# EAGLE board sensor (EAGLE 6.6.0)
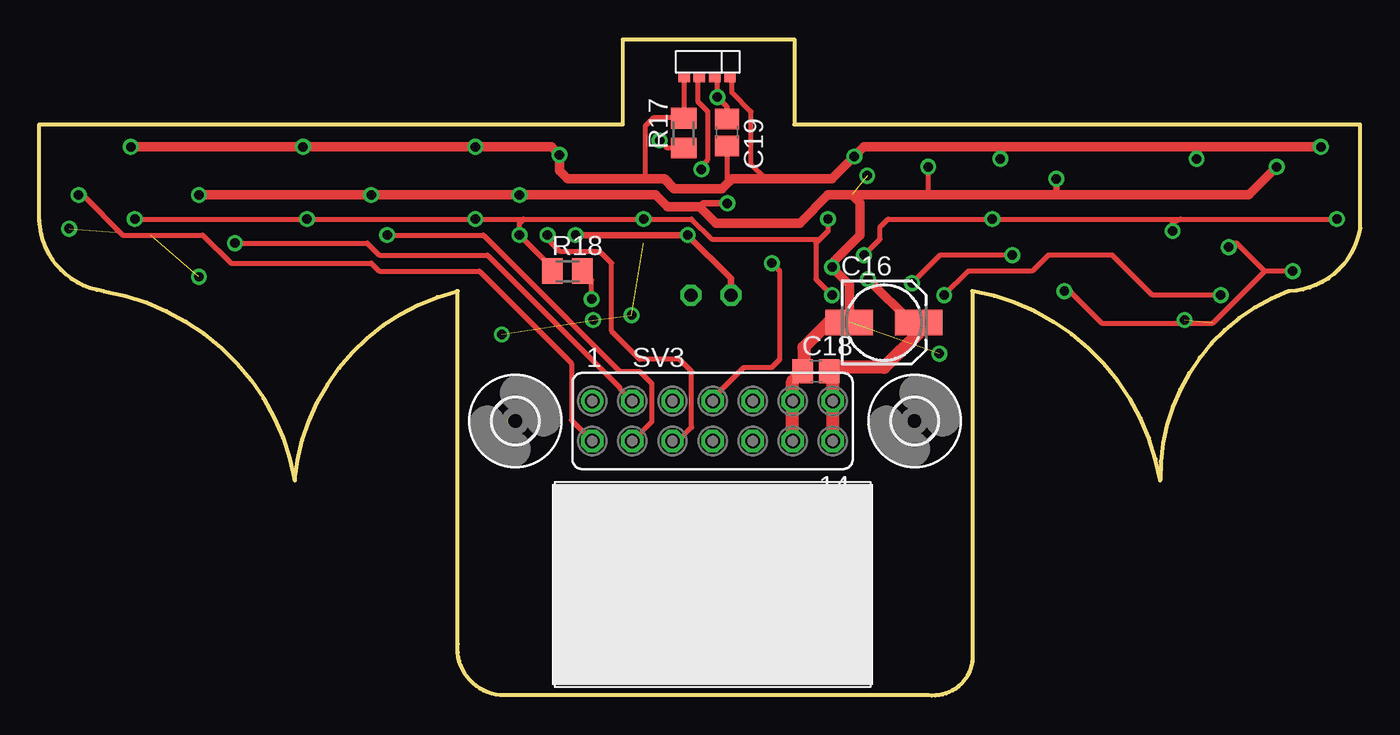
[diagram p0: board, top side]
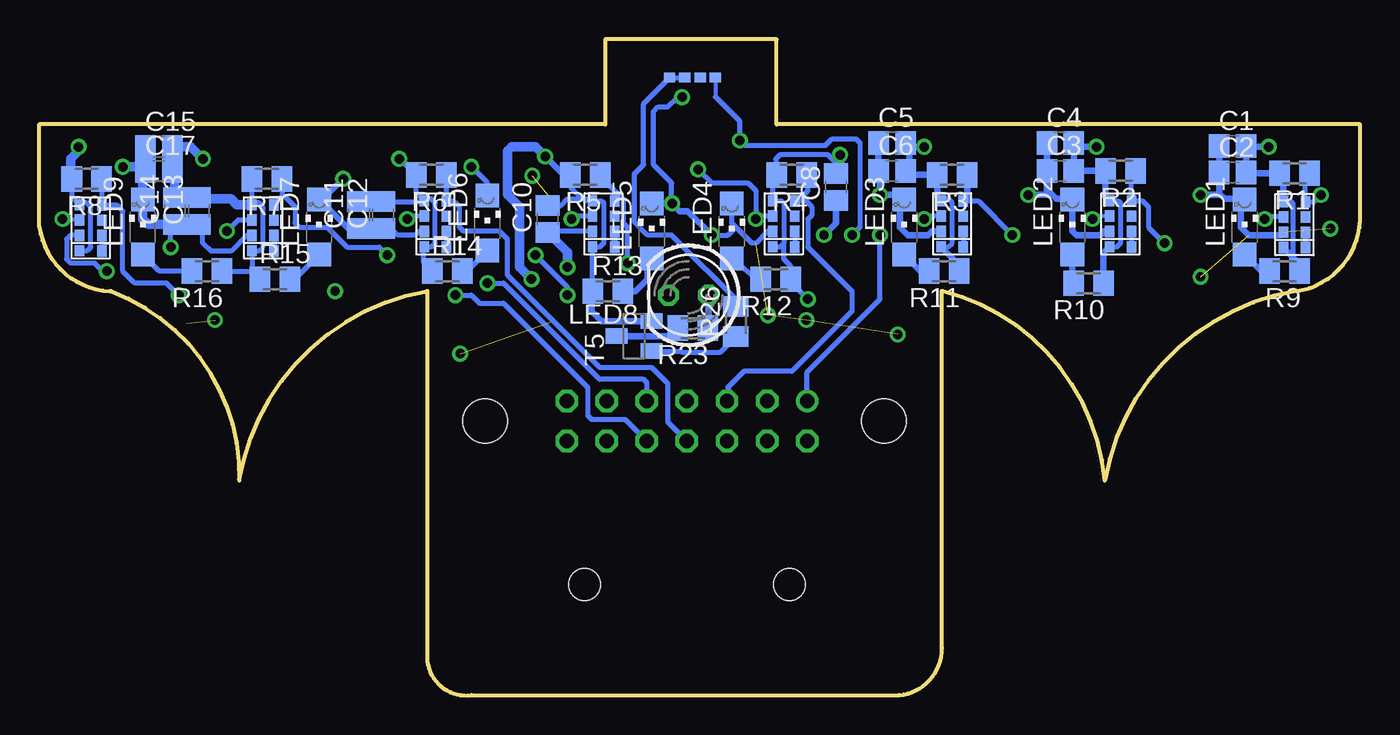
[diagram p1: board, bottom side, seen from below]

Size 83.72 x 41.57 mm. Coordinates in mm from the lower left corner, seen from the top.
Outline: 0,36.19 36.98,36.19 36.98,41.57 47.85,41.57 47.85,36.19 83.72,36.19 83.72,29.69 arc-80 79.25,25.62 79.17,25.62 arc71 71.04,13.63 arc71 59.16,25.62 59.13,25.62 59.13,2.15 arc-90 56.34,0.02 29.21,0.02 arc-90 26.52,3.27 26.52,25.62 26.47,25.62 arc71 16.18,13.63 arc71 4.06,25.62 arc-80 0,30.09 0,36.19
Copper layers (1*16): Top 0.035mm / dielectric 1.5mm / Bottom 0.035mm
Design rules "default *": minimum track width 10mil, minimum drill 24mil, track to track 10mil, track to pad 10mil, pad to pad 10mil, via to via 10mil, smd to smd 10mil, copper to edge 40mil, drill to drill 8mil, minimum pad ring 10mil, minimum via ring 8mil, stop-mask expansion 4mil, vias tented up to drill 0mil, thermal gap 10mil

## Footprints (pad centres in the part's own frame; a part is rotated, then mirrored left to right if it is on the bottom)
C0805 = smd 1.3 x 1.5: 1 -0.85,0; 2 0.85,0
153CLV-0505 = smd 3 x 1.6: + 2.2,0; - -2.2,0
2,8 = hole 2.8: 0,0
CHIPLED_1206 = smd 1.5 x 1.5: A 0,-1.75; C 0,1.75
LED5MM = drill 0.813 octagon: A -1.27,0; K 1.27,0
M0805 = smd 1.3 x 1.6: 1 -0.95,0; 2 0.95,0
FE07-2 = drill 0.914: 1 -7.62,1.27 | drill 0.914 octagon: 2 -7.62,-1.27; 3 -5.08,1.27; 4 -5.08,-1.27; 5 -2.54,1.27; 6 -2.54,-1.27; 7 0,1.27; 8 0,-1.27; 9 2.54,1.27; 10 2.54,-1.27; 11 5.08,1.27; 12 5.08,-1.27; 13 7.62,1.27; 14 7.62,-1.27
SOT23-BEC = smd 1 x 1.4: B -0.95,-1.1; C 0,1.1; E 0.95,-1.1
APDS9950 = smd 0.6 x 0.72: P$1 0.7,1.4; P$2 0.7,0.43; P$3 0.7,-0.54; P$4 0.7,-1.51; P$5 -0.7,-1.5; P$6 -0.7,-0.53; P$7 -0.7,0.44; P$8 -0.7,1.41
APDS9950_EDGE = smd 0.6 x 0.72 bottom: P$1 -0.9,1.5; P$2 -0.9,0.53; P$3 -0.9,-0.44; P$4 -0.9,-1.41 | smd 0.6 x 0.72: P$5 -0.9,-1.41; P$6 -0.9,-0.44; P$7 -0.9,0.53; P$8 -0.9,1.5
BALL_HOLE = hole 2: -6.5,0; 6.5,0

## Placement (x,y rotation side)
C1  10uF  [C0805]  8.08,34.82 0 bottom
C2  100n  [C0805]  8.08,33.14 0 bottom
C3  10uF  [C0805]  19,33.24 0 bottom
C4  100n  [C0805]  19,35.02 0 bottom
C5  10uF  [C0805]  29.67,35.02 0 bottom
C6  100n  [C0805]  29.67,33.24 0 bottom
C8  100n  [C0805]  33.22,32.23 90 bottom
C10  100n  [C0805]  51.51,30.2 90 bottom
C11  10uF  [C0805]  63.45,30.45 90 bottom
C12  100n  [C0805]  61.93,30.45 90 bottom
C13  10uF  [C0805]  73.61,30.7 90 bottom
C14  100n  [C0805]  75.13,30.7 90 bottom
C15  10uF  [C0805]  76.15,34.77 0 bottom
C16  22uF  [153CLV-0505]  53.54,23.64 0 top
C17  100n  [C0805]  76.15,33.24 0 bottom
C18  10uF  [C0805]  49.23,20.54 0 top
C19  100n  [C0805]  43.59,35.68 270 top
H3  MOUNT-HOLE2.8  [2,8]  30.18,17.39 0 top
H4  MOUNT-HOLE2.8  [2,8]  55.47,17.39 0 top
LED1  [CHIPLED_1206]  7.32,29.69 0 bottom
LED2  [CHIPLED_1206]  18.24,29.69 0 bottom
LED3  [CHIPLED_1206]  28.91,29.69 0 bottom
LED4  [CHIPLED_1206]  39.83,29.43 0 bottom
LED5  [CHIPLED_1206]  44.91,29.43 0 bottom
LED6  [CHIPLED_1206]  55.32,29.94 0 bottom
LED7  [CHIPLED_1206]  65.99,29.69 0 bottom
LED8  [LED5MM]  42.57,25.37 180 bottom
LED9  [CHIPLED_1206]  77.17,29.69 0 bottom
R1  4k7  [M0805]  4.17,33.09 180 bottom
R2  4k7  [M0805]  15.19,33.24 180 bottom
R3  4k7  [M0805]  25.86,32.99 180 bottom
R4  4k7  [M0805]  36.02,32.99 180 bottom
R5  4k7  [M0805]  49.12,32.99 180 bottom
R6  4k7  [M0805]  58.88,32.99 180 bottom
R7  4k7  [M0805]  69.29,32.74 180 bottom
R8  4k7  [M0805]  80.72,32.74 180 bottom
R9  330  [M0805]  4.78,26.89 180 bottom
R10  330  [M0805]  17.22,26.13 180 bottom
R11  330  [M0805]  26.37,26.89 180 bottom
R12  330  [M0805]  37.03,26.39 180 bottom
R13  330  [M0805]  47.7,25.62 0 bottom
R14  330  [M0805]  57.86,26.89 0 bottom
R15  330  [M0805]  68.78,26.39 0 bottom
R16  330  [M0805]  73.1,26.89 180 bottom
R17  4k7  [M0805]  40.84,35.63 90 top
R18  4k7  [M0805]  33.48,26.89 0 top
R23  22  [M0805]  42.32,23.29 180 bottom
R26  330  [M0805]  39.57,23.69 90 bottom
SV3  [FE07-2]  42.67,17.39 0 top
T5  [SOT23-BEC]  46.02,22.78 90 bottom
U$1  APDS9950  [APDS9950]  4.17,29.89 0 bottom
U$2  APDS9950_EDGE  [APDS9950_EDGE]  42.37,40.05 90 top
U$3  [BALL_HOLE]  42.67,7.03 0 top
U$4  APDS9950  [APDS9950]  15.19,29.94 0 bottom
U$5  APDS9950  [APDS9950]  25.86,29.94 0 bottom
U$6  APDS9950  [APDS9950]  36.53,29.94 0 bottom
U$7  APDS9950  [APDS9950]  47.96,29.94 0 bottom
U$8  APDS9950  [APDS9950]  58.62,29.94 0 bottom
U$9  APDS9950  [APDS9950]  69.55,29.69 0 bottom
U$10  APDS9950  [APDS9950]  80.47,29.69 0 bottom

## Library data of the parts
C1-C6 C8 C10-C19 R1-R18 R23 R26 = resistor
H3 H4 = holes
LED1-LED7 LED9 U$1 U$2 U$4-U$10 = my_parts
LED8 = led
SV3 = con-lsta; OC_FARNELL: unknown; OC_NEWARK: unknown
T5 = transistor
U$3 = pololu

## Nets
+3V3: C1.2 C2.2 C3.2 C4.2 C5.2 C6.2 C8.2 C10.2 C11.2 C12.2 C13.2 C14.2 C15.2 C16.+ C17.2 C18.2 C19.2 R1.2 R2.2 R3.2 R4.2 R5.2 R6.2 R7.2 R8.2 R9.1 R10.1 R11.1 R12.1 R13.1 R14.1 R15.1 R16.1 R17.2 R18.2 SV3.13 SV3.14 T5.E U$1.P$5 U$1.P$8 U$2.P$5 U$2.P$8 U$4.P$5 U$4.P$8 U$5.P$5 U$5.P$8 U$6.P$5 U$6.P$8 U$7.P$5 U$7.P$8 U$8.P$5 U$8.P$8 U$9.P$5 U$9.P$8 U$10.P$5 U$10.P$8
ADC0_: R8.1 SV3.10 U$10.P$1
ADC1_: R7.1 SV3.9 U$9.P$1
ADC2_: R6.1 SV3.8 U$8.P$1
ADC3_: R5.1 SV3.7 U$7.P$1
ADC4_: R4.1 SV3.5 U$6.P$1
ADC5_: R3.1 SV3.4 U$5.P$1
ADC6_: R2.1 SV3.3 U$4.P$1
ADC7_: R1.1 SV3.2 U$1.P$1
ADC8_: R17.1 SV3.6 U$2.P$1
GND: C1.1 C2.1 C3.1 C4.1 C5.1 C6.1 C8.1 C10.1 C11.1 C12.1 C13.1 C14.1 C15.1 C16.- C17.1 C18.1 C19.1 LED1.C LED2.C LED3.C LED4.C LED5.C LED6.C LED7.C LED8.K LED9.C SV3.11 SV3.12 U$1.P$6 U$2.P$6 U$4.P$6 U$5.P$6 U$6.P$6 U$7.P$6 U$8.P$6 U$9.P$6 U$10.P$6
N$1: R23.2 T5.C
N$2: U$4.P$3 U$4.P$4
N$3: LED1.A R9.2
N$4: U$1.P$3 U$1.P$4
N$5: LED2.A R10.2
N$6: LED3.A R11.2
N$7: LED4.A R12.2
N$8: LED5.A R13.2
N$9: U$5.P$3 U$5.P$4
N$13: LED6.A R14.2
N$14: LED7.A R15.2
N$15: U$6.P$3 U$6.P$4
N$16: LED9.A R16.2
N$19: R26.2 U$2.P$3 U$2.P$4
N$20: U$7.P$3 U$7.P$4
N$24: U$8.P$3 U$8.P$4
N$27: U$9.P$3 U$9.P$4
N$28: LED8.A R23.1
N$31: U$10.P$3 U$10.P$4
N$32: R26.1 T5.B
SCL: R18.1 SV3.1 U$1.P$7 U$2.P$7 U$4.P$7 U$5.P$7 U$6.P$7 U$7.P$7 U$8.P$7 U$9.P$7 U$10.P$7

## Tracks (layer width: path | path; a pad name or v marks a point on that pad's centre or on a via)
+3V3  (via drill 0.6)
  Top 0.305: 55.58,23.47 55.58,23.17 55.74,23 | v35,25.12 35,26.32 R18.2 | U$2.P$8 40.87,36.61 | C19.2 43.59,32.74 43.74,32.58 | 40.87,36.61 38.92,36.61 38.41,36.09 38.41,33.04 38.71,32.74 | 50.24,32.74 46.03,32.74 45.11,33.65 45.11,37 43.89,38.22 43.89,39.04 U$2.P$5 | 40.87,36.61 R17.2
  Top 0.61: v5.79,34.77 v16.71,34.77 v27.64,34.77 32.46,34.77 v32.97,34.26 32.97,33.24 33.48,32.74 38.71,32.74 39.62,32.74 40.23,32.13 43.28,32.13 43.74,32.58 43.89,32.74 50.24,32.74 v51.66,34.16 52.27,34.77 60.91,34.77 | 60.91,34.77 73.36,34.77 | 73.36,34.77 v81.23,34.77 | v60.91,34.01 60.91,34.77 | v73.36,34.01 73.36,34.77 | C16.+ 55.27,23.64 v52.53,26.39
  Top 0.813: SV3.14 SV3.13 50.29,20.33 C18.2 50.33,20.8 53.54,20.8 55.74,23 | 55.58,23.47 C16.+
  Bottom 0.305: U$5.P$5 26.09,28.44 25.86,28.67 25.86,31.21 26.11,31.47 26.44,31.47 U$5.P$8 | U$1.P$8 4.36,31.3 4.27,31.21 4.27,27.79 4.07,27.6 | U$4.P$8 15.33,31.35 15.19,31.21 15.19,28.67 15.44,28.42 15.87,28.42 U$4.P$5 | 36.53,28.67 36.53,31.21 36.67,31.35 U$6.P$8 37.23,32.73 R4.2 37.03,33.06 37.03,34.01 36.78,34.26 33.73,34.26 33.22,33.75 C8.2 | 36.53,28.67 36.78,28.42 37.2,28.42 U$6.P$5 | 36.53,28.67 36.53,27.66 36.08,27.21 R12.1 36.08,26.2 v35,25.12 | U$8.P$8 59.21,31.47 58.88,31.47 58.62,31.21 58.62,28.67 58.85,28.44 U$8.P$5 59.39,28.38 59.39,27.47 R14.1 58.62,26.39 | U$8.P$8 59.83,31.86 R6.2 | U$8.P$8 59.38,31.3 C12.2 C11.2 | U$7.P$8 48.1,31.35 47.96,31.21 47.96,28.67 48.21,28.42 48.63,28.42 U$7.P$5 R13.1 | U$7.P$8 49.11,31.35 49.23,31.47 | C10.2 50.66,31.05 50.24,31.47 49.33,31.47 | 49.23,31.47 48.77,31.47 U$7.P$8 | R7.2 U$9.P$8 70.13,31.21 69.8,31.21 69.55,30.96 69.55,28.42 69.78,28.19 U$9.P$5 70.25,26.9 R15.1 70.24,26.89 R16.1 | C15.2 75.3,34.26 C17.2 | U$10.P$5 80.7,28.19 80.47,28.42 80.47,30.96 80.72,31.21 81.05,31.21 U$10.P$8 81.67,31.6 R8.2 | 49.23,31.47 49.33,31.47 | 49.33,31.47 49.99,32.13 49.99,33.21 R5.2 50.5,32.99
  Bottom 0.406: U$1.P$8 4.87,33.1 R1.2 7.18,33.09 C2.2 | 7.02,33.35 C2.2 | 4.84,28.42 U$1.P$5 4.07,27.6 3.83,27.35 R9.1 | C1.2 C2.2 | U$4.P$8 16.14,31.6 R2.2 C3.2 C4.2 17.9,34.77 v16.71,34.77 | R10.1 16.27,28.06 U$4.P$5 | C2.2 7.23,34.6 7.06,34.77 v5.79,34.77 | 28.56,34.77 28.56,33.5 C6.2 28.56,32.99 R3.2 26.81,31.6 U$5.P$8 | v27.64,34.77 28.56,34.77 | 28.56,34.77 C5.2 | R11.1 25.42,27.3 U$5.P$5 | 50.5,32.99 v51.66,34.16 | T5.E 48.09,23.73 48.72,24.35 48.72,25.56 R13.1 | v60.91,34.01 60.84,34.01 R6.2
  Bottom 0.61: v81.23,34.77 81.23,34.51 81.74,34.01 81.74,32.8 R8.2 | R6.2 59.89,32.99 | C15.2 74.12,34.77 v73.36,34.01 | 75.3,34.26 75.13,34.09 C14.2 C13.2 72.76,31.47 71.58,31.47 71.21,31.1 U$9.P$8 | v52.53,26.39 53.29,27.15 53.29,30.96 54.05,31.72 54.05,34.51 53.8,34.77 52.27,34.77 v51.66,34.16 | v32.97,34.26 32.97,33.33 C8.2
ADC0_  (via drill 0.6)
  Top 0.305: v74.88,25.37 70.56,25.37 68.02,27.91 63.96,27.91 62.94,26.89 58.88,26.89 v57.35,25.37
  Bottom 0.305: R8.1 U$10.P$1 78.82,31.09 78.44,30.7 78.44,26.89 77.67,26.13 75.64,26.13 v74.88,25.37 | v57.35,25.37 56.34,25.37 55.83,24.86 54.31,24.86 48.97,19.53 48.97,17.75 48.72,17.5 46.58,17.5 SV3.10
ADC1_  (via drill 0.6)
  Top 0.305: v61.67,27.91 57.1,27.91 v55.32,26.13
  Bottom 0.305: R7.1 68.34,31.59 | 68.34,31.59 U$9.P$1 | 68.34,31.59 68.15,31.59 67.51,30.96 67.51,29.94 67.26,29.69 65.48,29.69 64.21,28.42 62.18,28.42 v61.67,27.91 | SV3.9 45.21,19.83 45.42,20.04 48.21,20.04 54.31,26.13 v55.32,26.13
ADC2_
  Bottom 0.305: U$8.P$1 R6.1 | U$8.P$1 57.48,31.34 | SV3.8 43.89,17.34 43.89,19.78 44.91,20.8 48.21,20.8 54.05,26.64 54.05,28.93 54.56,29.43 56.85,29.43 57.1,29.69 57.1,30.96 57.35,31.21 57.79,31.21 U$8.P$1
ADC3_  (via drill 0.6)
  Top 0.305: SV3.7 42.67,18.82 44.65,20.8 46.43,20.8 46.94,21.31 46.94,26.89 v46.43,27.4
  Bottom 0.305: 47.26,31.97 U$7.P$1 47.13,31.47 | v46.43,27.4 46.43,29.69 46.69,29.94 46.69,31.4 47.26,31.97 | R5.1 48.17,32.89 47.26,31.97
ADC4_
  Bottom 0.305: R4.1 35,32.92 35,31.97 35.63,31.34 U$6.P$1 35.13,31.34 34.75,30.96 34.75,30.45 35,30.2 35,28.42 32.21,25.62 32.21,24.35 36.02,20.54 39.07,20.54 40.08,19.53 40.08,18.71 SV3.5
ADC5_  (via drill 0.6)
  Top 0.305: SV3.4 38.81,17.34 38.81,19.78 38.05,20.54 36.78,20.54 28.14,29.18 v22.05,29.18
  Bottom 0.305: 24.91,31.59 U$5.P$1 24.21,31.34 v22.05,29.18
  Bottom 0.406: R3.1 24.91,31.59
ADC6_  (via drill 0.6)
  Top 0.305: v12.4,28.67 20.78,28.67 21.54,27.91 28.4,27.91 36.78,19.53 36.78,19.48 SV3.3
  Bottom 0.305: R2.1 14.49,32.99 U$4.P$1 13.8,31.34 13.41,30.96 13.41,29.69 v12.4,28.67
ADC7_  (via drill 0.6)
  Top 0.305: v2.49,31.72 2.74,31.72 5.28,29.18 10.36,29.18 12.14,27.4 21.03,27.4 21.54,26.89 27.89,26.89 33.73,21.05 33.73,17.44 SV3.2
  Bottom 0.305: R1.1 3.47,33.1 U$1.P$1 2.92,31.29 v2.49,31.72
ADC8_  (via drill 0.6)
  Top 0.305: SV3.6 40.49,16.12 41.35,16.99 41.35,20.54 40.59,21.31 38.05,21.31 36.27,23.08 36.27,27.4 35.51,28.16 32.97,28.16 32.21,28.93 v32.21,29.18 | R17.1 39.81,34.68 v39.32,35.17
  Bottom 0.254: U$2.P$1 40.87,37.94
  Bottom 0.305: v32.21,29.18 31.7,29.69 31.7,35.02 31.95,35.28 33.48,35.28 33.88,34.87 39.01,34.87 v39.32,35.17 39.32,36.39 40.87,37.94
GND  (via drill 0.6)  (8 unrouted)
  Top 0.305: v79.45,26.89 77.67,26.89 | 77.67,26.89 75.9,28.67 75.64,28.67 v75.39,28.42 | v56.34,33.5 56.34,31.72 | v64.97,25.62 65.33,25.62 67.36,23.59 74.37,23.59 77.67,26.89 | U$2.P$6 42.98,38.98 v42.98,37.92 43.59,37.31 C19.1
  Top 0.406: v33.99,29.18 v41.1,29.18 43.84,26.44 LED8.K | v64.47,32.74 64.47,31.72 | v43.61,31.18 42.09,31.18 41.86,30.96
  Top 0.61: v10.11,31.72 v21.03,31.72 v30.43,31.72 39.07,31.72 39.83,30.96 41.86,30.96 42.88,29.94 48.21,29.94 49.99,31.72 51.51,31.72 | v78.44,33.5 76.66,31.72 64.47,31.72 56.34,31.72 51.51,31.72 | C16.- 51.34,26.05 v50.24,27.15 50.24,27.4 52.02,29.18 52.02,31.21 51.51,31.72
  Top 0.813: SV3.12 SV3.11 47.75,19.92 C18.1 48.46,20.63 48.46,22.07 50.04,23.64 C16.- 51,23.3
  Bottom 0.305: v41.1,29.18 40.08,29.18 39.57,29.69 | C11.1 C12.1 61.23,29.41 61,29.18 59.89,29.18 59.66,29.41 U$8.P$6 | 39.57,29.69 39.83,29.94 LED4.C 39.83,31.47 | U$7.P$6 51.7,29.41 C10.1 | U$9.P$6 70.58,29.16 71.58,28.16 72.85,28.16 73.36,28.67 73.36,29.6 C13.1 | U$10.P$6 81.76,29.16 81.99,28.93 81.99,27.66 81.74,27.4 80.21,27.4 79.71,26.89 v79.45,26.89 | v75.39,28.42 75.39,29.6 C14.1 | LED6.C 55.32,32.48 v56.34,33.5 | 39.57,29.69 38.56,28.67 38.3,28.67 37.56,29.41 U$6.P$6 | 43.64,31.21 43.64,32.48 44.81,33.65 44.81,37 44.5,37.31 43.89,37.31 43.28,37.92 v42.98,37.92
  Bottom 0.406: C1.1 C2.1 8.93,31.81 | 8.93,31.81 8.59,31.47 7.34,31.47 LED1.C 7.57,31.18 7.57,29.69 7.06,29.18 5.05,29.18 U$1.P$6 | C4.1 C3.1 19.85,32.06 19.51,31.72 | 19.51,31.72 19.25,31.47 18.27,31.47 LED2.C 18.24,29.43 17.98,29.18 16.46,29.18 16.23,29.41 U$4.P$6 | v21.03,31.72 19.51,31.72 | v10.11,31.72 9.02,31.72 8.93,31.81 | C5.1 C6.1 30.43,33.16 v30.43,31.72 29.19,31.72 LED3.C 29.16,31.18 29.16,29.69 28.65,29.18 27.38,29.18 27.15,29.41 U$5.P$6 | 32.88,31.72 C8.1 33.22,29.94 v33.99,29.18 | v64.47,32.74 65.76,31.44 LED7.C 64.15,29.6 C11.1 | LED5.C v43.61,31.18 | v43.61,31.18 43.13,30.7 42.62,30.7 v41.1,29.18 | v43.61,31.18 43.64,31.21
  Bottom 0.61: 77,33.75 C17.1 77.17,33.08 LED9.C 77.17,30.2 76.82,29.85 C14.1 C13.1 | 77,33.75 C15.1 | v78.44,33.5 77.25,33.5 77,33.75 | v50.24,27.15 50.24,28.08 C10.1
  other vias: 10.11,26.54 1.88,29.59 29.31,22.88 37.54,24.1 35.1,23.79 57.05,21.66 52.48,32.94 72.59,23.79
N$1
  Bottom 0.406: T5.C 43.77,22.78 R23.2
N$2
  Bottom 0.305: U$4.P$3 U$4.P$4
N$3
  Bottom 0.406: R9.2 6.27,26.89 LED1.A
N$4
  Bottom 0.305: U$1.P$3 U$1.P$4
N$5
  Bottom 0.406: LED2.A 18.24,26.2 R10.2
N$6
  Bottom 0.406: R11.2 27.86,26.89 LED3.A
N$7
  Bottom 0.305: R12.2 38.28,26.39 LED4.A
N$8
  Bottom 0.406: R13.2 45.92,25.62 45.16,26.39 45.16,27.43 LED5.A
N$9
  Bottom 0.305: U$5.P$3 U$5.P$4
N$13
  Bottom 0.305: R14.2 56.62,26.89 LED6.A
N$14
  Bottom 0.305: R15.2 67.54,26.39 LED7.A
N$15
  Bottom 0.305: U$6.P$3 U$6.P$4
N$16
  Bottom 0.305: R16.2 76.12,26.89 LED9.A
N$19
  Bottom 0.305: R26.2 39.27,24.81 43.64,29.18 45.16,29.18 46.03,30.04 46.03,33.04 45.42,33.65 45.42,37.51 U$2.P$4 U$2.P$3
N$20
  Bottom 0.406: U$7.P$3 U$7.P$4
N$24
  Bottom 0.305: U$8.P$3 U$8.P$4
N$27
  Bottom 0.305: U$9.P$3 U$9.P$4
N$28
  Bottom 0.406: LED8.A 41.3,23.35 R23.1
N$31
  Bottom 0.305: U$10.P$3 U$10.P$4
N$32
  Bottom 0.305: T5.B 43.04,21.83 42.98,21.76 40.55,21.76 R26.1
SCL  (via drill 0.6)
  Top 0.305: v27.64,30.2 27.38,30.2 | v6.05,30.2 v16.97,30.2 v27.64,30.2 | 30.68,30.2 30.43,29.94 v30.43,29.18 32.02,27.59 R18.1 | v27.64,30.2 30.68,30.2 | 30.68,30.2 v38.3,30.2 41.35,30.2 42.62,28.93 49.48,28.93 | 72.34,30.2 v60.4,30.2 53.8,30.2 53.29,29.69 53.29,28.93 v52.27,27.91 | 72.34,30.2 v82.25,30.2 | v71.83,29.43 71.83,29.94 72.34,30.2 | 49.48,28.93 49.99,29.43 v49.99,30.2 | 49.48,28.93 49.23,28.67 49.23,26.39 v50.24,25.37 | v41.96,33.35 41.96,33.55 42.37,33.95 42.37,37 41.76,37.61 41.76,39.07 U$2.P$7
  Bottom 0.254: U$4.P$7 16.78,30.38 v16.97,30.2 | v82.25,30.2 81.24,30.2 U$10.P$7
  Bottom 0.305: U$1.P$7 5.91,30.33 v6.05,30.2 | U$5.P$7 27.45,30.38 v27.64,30.2 | SV3.1 35.05,20.49 30.43,25.12 v30.43,29.18 | U$6.P$7 38.12,30.38 v38.3,30.2 38.3,31.97 38.81,32.48 41.1,32.48 v41.96,33.35 | U$9.P$7 71.14,30.13 v71.83,29.43 | U$8.P$7 60.22,30.38 v60.4,30.2 | U$7.P$7 49.8,30.38 v49.99,30.2 | v50.24,25.37 50.24,25.88 v52.27,27.91